# Altium PCB JacdacRotary 26.PcbDoc
Units mm, origin at the board's own origin, x right, y up, seen from the top; angles counter-clockwise.
Board outline 18.5 x 30.65 mm, 2 copper layers (Top Layer, Bottom Layer), stack 1.525 mm thick; 28 components, 20 nets, 93 pads, 20 vias.
Unrouted connection lines stored in the file: 14.
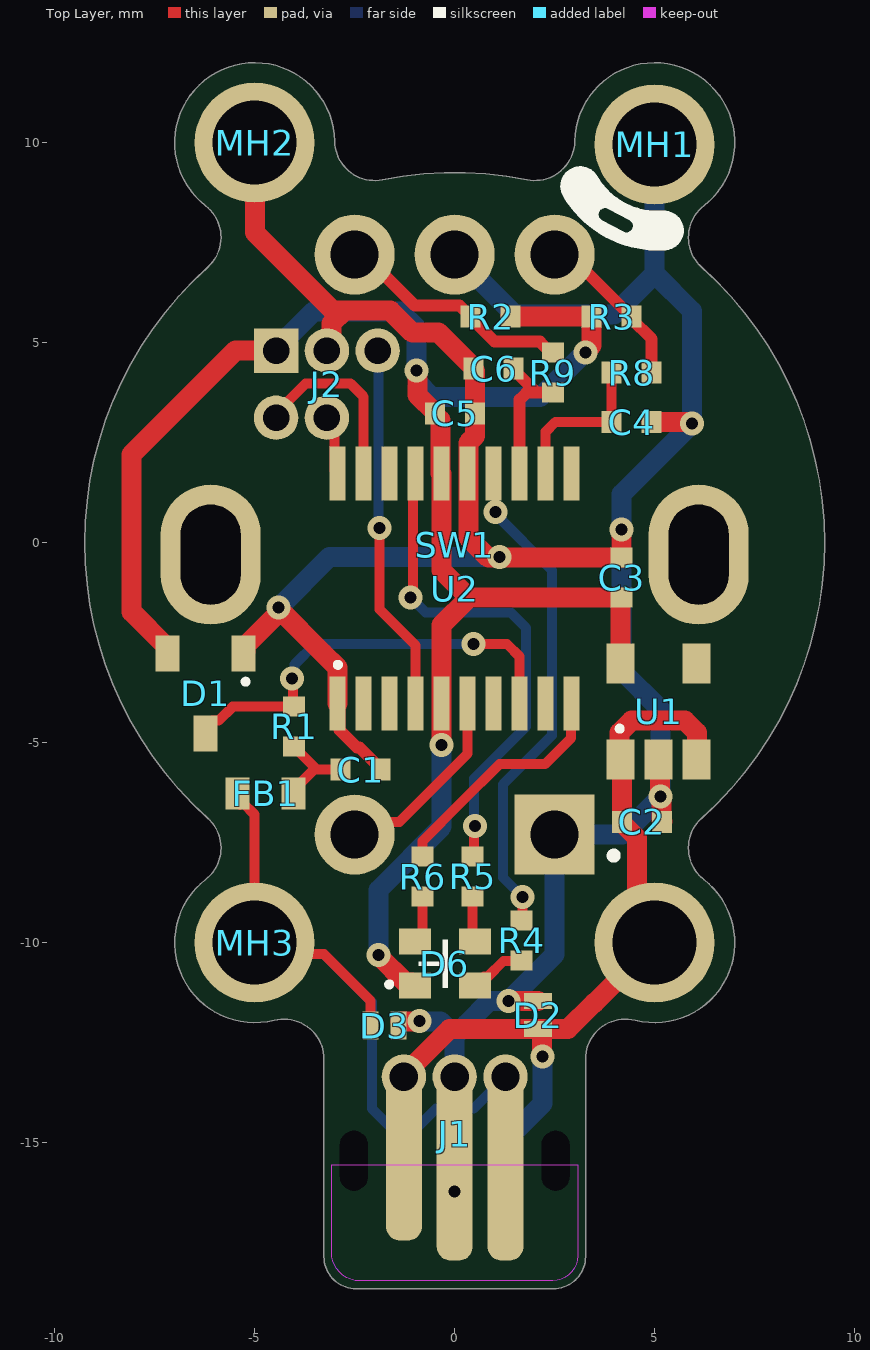
[diagram p0: Top Layer view]
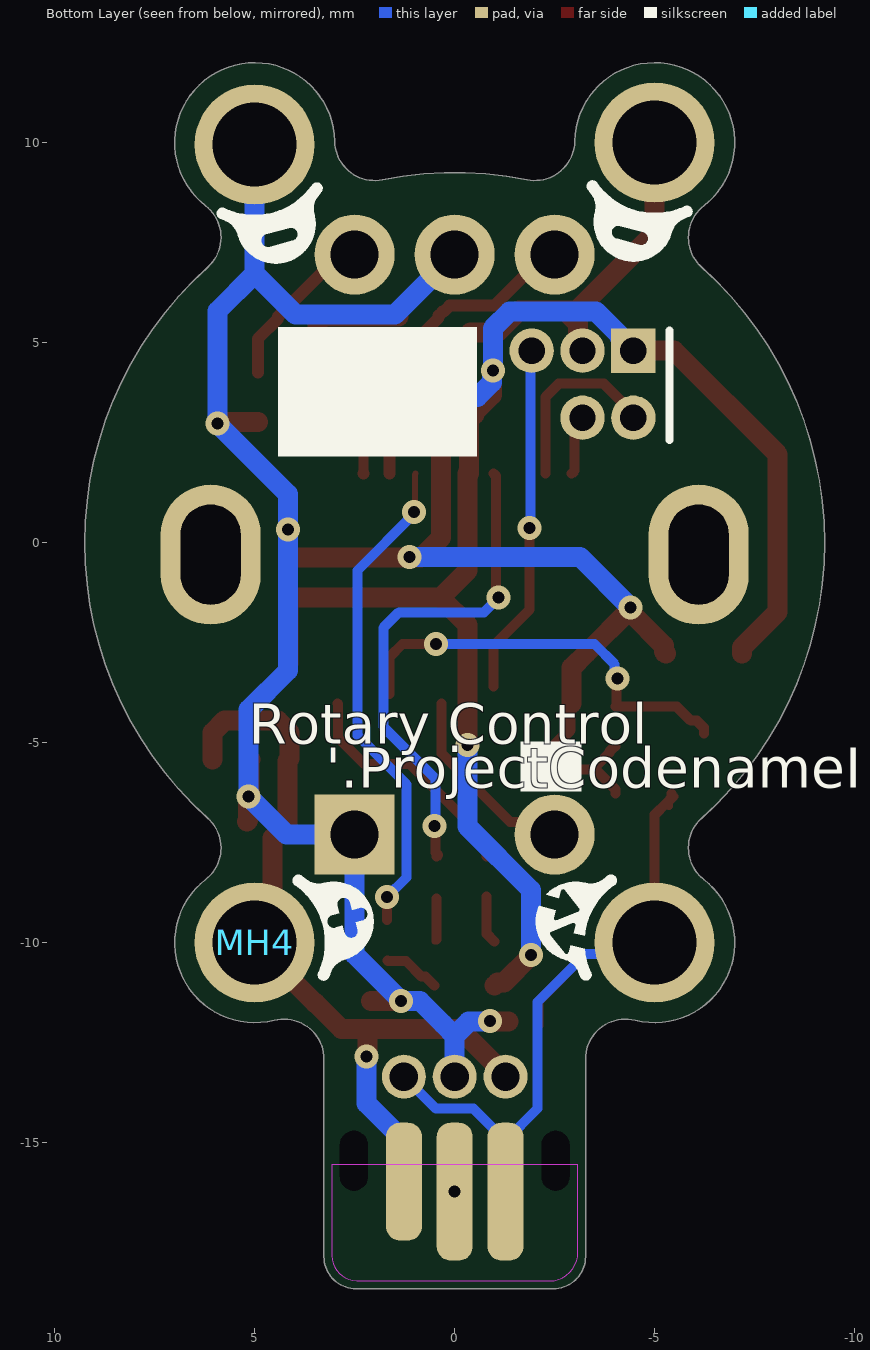
[diagram p1: Bottom Layer view, seen from below]

## Layer stack, top to bottom
Top Solder: solder mask 0.0102, Solder Resist, Dk 3.5
Top Layer: signal copper 0.0356
Dielectric 1: core 1.454, FR-4, Dk 4.2
Bottom Layer: signal copper 0.0356
Bottom Solder: solder mask 0.0102, Solder Resist, Dk 3.5

## Board outline
-3.27,-17.85 -3.27,-13.072 -3.27,-12.91 ccw(c-4.27,-12.91) -4.513,-11.94 cw(c-5,-10) -6.228,-8.422 ccw(c-6.842,-7.632) -6.174,-6.888 cw(c0,0) -6.175,6.888 ccw(c-6.842,7.632) -6.228,8.421 cw(c-5,10) -3,10.035 ccw(c-2,10.053) -1.805,9.072 cw(c0,0) 1.805,9.072 ccw(c2,10.053) 3,10.035 cw(c5,10) 6.228,8.421 ccw(c6.842,7.632) 6.175,6.888 cw(c0,0) 6.175,-6.888 ccw(c6.842,-7.632) 6.228,-8.421 cw(c5,-10) 4.513,-11.94 ccw(c4.27,-12.91) 3.27,-12.909 3.27,-13.071 3.27,-17.85 cw(c2.471,-17.851) 2.47,-18.65 -2.47,-18.65 cw(c-2.471,-17.851)

## Design rules (kind name [scope] priority, off if disabled: settings)
AssemblyTestPointUsage [All] p1: valid=2
BoardOutlineClearance BoardOutlineSwitchClearance [InComponent('SW1')] p1: gap=0.3 ignorepadtopadclearanceinfootprint=FALSE except(0: Arc-SplitContinuation Track-SplitContinuation SMDPad-SplitContinuation THPad-OutlineEdge THPad-SplitContinuation Via-SplitContinuation Fill-SplitContinuation Poly-SplitContinuation Region-SplitContinuation Text-SplitContinuation; 0.2: Text-OutlineEdge)
BoardOutlineClearance [All] p2: gap=0.3 ignorepadtopadclearanceinfootprint=FALSE except(0: Arc-SplitContinuation Track-SplitContinuation SMDPad-SplitContinuation THPad-SplitContinuation Via-SplitContinuation Fill-SplitContinuation Poly-SplitContinuation Region-OutlineEdge Region-SplitContinuation Text-SplitContinuation; 0.2: Text-OutlineEdge)
Clearance [All] p1: gap=0.125 ignorepadtopadclearanceinfootprint=FALSE except(0: Arc-Hole Track-Hole SMDPad-Hole THPad-Hole Via-Hole Fill-Hole Poly-Hole Region-Hole Text-Hole)
ComponentClearance MH5.0KeepoutaAreaClearance [InComponent('MH1') or InComponent('MH2')  or InComponent('MH3')  or InComponent('MH4') vs InComponent('SW1') or InComponent('J1') or InComponent('U3')] p1: gap=0 collisioncheckmode=3 verticalgap=0 showdistances=FALSE
ComponentClearance [All] p2: gap=0.2 collisioncheckmode=3 verticalgap=0.2 showdistances=FALSE
DiffPairsRouting [All] p1: maxlimit=2 minlimit=0.15 mostfreqgap=0.15 toplayer_minwidth=0.15 toplayer_maxwidth=2 toplayer_prefwidth=0.15 bottomlayer_minwidth=0.15 bottomlayer_maxwidth=2 bottomlayer_prefwidth=0.15 substack1={CB9D278B-8BF5-444A-AAF4-837A2A9DF42D} toplayer_{cb9d278b-8bf5-444a-aaf4-837a2a9df42d}_minwidth=0.381 toplayer_{cb9d278b-8bf5-444a-aaf4-837a2a9df42d}_maxwidth=0.381 toplayer_{cb9d278b-8bf5-444a-aaf4-837a2a9df42d}_prefwidth=0.381 bottomlayer_{cb9d278b-8bf5-444a-aaf4-837a2a9df42d}_minwidth=0.381 bottomlayer_{cb9d278b-8bf5-444a-aaf4-837a2a9df42d}_maxwidth=0.381 bottomlayer_{cb9d278b-8bf5-444a-aaf4-837a2a9df42d}_prefwidth=0.381 substack2={826B8647-A721-4255-895A-19F9591B9CD1} toplayer_{826b8647-a721-4255-895a-19f9591b9cd1}_minwidth=0.381 toplayer_{826b8647-a721-4255-895a-19f9591b9cd1}_maxwidth=0.381 toplayer_{826b8647-a721-4255-895a-19f9591b9cd1}_prefwidth=0.381 bottomlayer_{826b8647-a721-4255-895a-19f9591b9cd1}_minwidth=0.381 bottomlayer_{826b8647-a721-4255-895a-19f9591b9cd1}_maxwidth=0.381 bottomlayer_{826b8647-a721-4255-895a-19f9591b9cd1}_prefwidth=0.381 substack3={E64FCAF4-1BC8-437D-B1E0-0E5F2DC0F59E} toplayer_{e64fcaf4-1bc8-437d-b1e0-0e5f2dc0f59e}_minwidth=0.381 toplayer_{e64fcaf4-1bc8-437d-b1e0-0e5f2dc0f59e}_maxwidth=0.381 toplayer_{e64fcaf4-1bc8-437d-b1e0-0e5f2dc0f59e}_prefwidth=0.381 bottomlayer_{e64fcaf4-1bc8-437d-b1e0-0e5f2dc0f59e}_minwidth=0.381 bottomlayer_{e64fcaf4-1bc8-437d-b1e0-0e5f2dc0f59e}_maxwidth=0.381 bottomlayer_{e64fcaf4-1bc8-437d-b1e0-0e5f2dc0f59e}_prefwidth=0.381 substack4={E61CE66C-507C-4E1E-8E83-C905434AFC1C} toplayer_{e61ce66c-507c-4e1e-8e83-c905434afc1c}_minwidth=0.381 toplayer_{e61ce66c-507c-4e1e-8e83-c905434afc1c}_maxwidth=0.381 toplayer_{e61ce66c-507c-4e1e-8e83-c905434afc1c}_prefwidth=0.381 bottomlayer_{e61ce66c-507c-4e1e-8e83-c905434afc1c}_minwidth=0.381 bottomlayer_{e61ce66c-507c-4e1e-8e83-c905434afc1c}_maxwidth=0.381 bottomlayer_{e61ce66c-507c-4e1e-8e83-c905434afc1c}_prefwidth=0.381 maxuncoupledlength=25
FabricationTestPointUsage [All] p1: valid=2 allowmultiple=FALSE
HoleSize [All] p1: absolutevalues=TRUE maxlimit=2.54 minlimit=0.2 maxpercent=80.000 minpercent=20.000
MinimumSolderMaskSliver [All] p1: minsoldermaskwidth=0.005
PlaneClearance [All] p1: clearance=0.3
PlaneConnect [All] p1: planeconnectstyle=Relief reliefexpansion=0.5 reliefentries=4 reliefconductorwidth=0.2 reliefairgap=0.3
PolygonConnect "PolygonConnect GND" [isVIA] p1: connectstyle=Relief reliefconductorwidth=0.2 reliefentries=4 polygonreliefangle="90 Angle" airgapwidth=0.2
PolygonConnect [All] p2: connectstyle=Relief reliefconductorwidth=0.2 reliefentries=4 polygonreliefangle="90 Angle" airgapwidth=0.2
RoutingVias [All] p1: holewidth=0.3 width=0.6 viastyle="Through Hole" minholewidth=0.3 minwidth=0.6 maxholewidth=0.3 maxwidth=0.8
SilkToSilkClearance [All] p1: silktosilkclearance=0.001
SilkToSolderMaskClearance [IsPad] p1: minsilkscreentomaskgap=0.05 clearancetoexposedcopper=TRUE
SolderMaskExpansion [All] p1: expansion=0.075 istentingtop=FALSE
Width [All] p1: maxlimit=2 minlimit=0.15 preferedwidth=0.15 substack1={CB9D278B-8BF5-444A-AAF4-837A2A9DF42D} substack2={826B8647-A721-4255-895A-19F9591B9CD1} substack3={E64FCAF4-1BC8-437D-B1E0-0E5F2DC0F59E} substack4={E61CE66C-507C-4E1E-8E83-C905434AFC1C} minimp=50.000000 maximp=50.000000 favimp=50.000000
20 further rules are at their usual default settings.

## Components (designator, comment, footprint, x,y, rotation, side; value= is the part's Value field where it differs from the comment)
C1 "CL05C330JB5NNNC" "C0402_0.55MM - without outline" -2.35,-5.675 r180 top
C2 "CL05A105KP5NNNC" "C0402_0.55MM - without outline" 4.68,-6.981 r180 top
C3 "CL05A105KP5NNNC" "C0402_0.55MM - without outline" 4.17,-0.875 r270 top
C4 "Samsung'''" "C0402_0.55MM - without outline" 4.421,3.015 r180 top
C5 "CL05A105KP5NNNC" "C0402_0.55MM - without outline" 0.005,3.23 r180 top
C6 "Samsung'''" "C0402_0.55MM - without outline" 0.975,4.35 r0 top
D1 "BAT54S" "NXP-BAT54S-TO-236AB - without outline" -6.228,-3.777 r270 top
D2 "RCLAMP0521P-N" "TVS 0402 - L" 2.087,-11.809 r90 top
D3 "RCLAMP0521P-N" "TVS 0402 - L" -1.75,-12.075 r0 top
D6 "TZ-P4-1615RGBTCA1-0.55T" TZ-P4-1615RGBTCA1-0.55T -0.246,-10.525 r0 top
FB1 "TDK MPZ1608S102ATA00" "TDK MPZ1608 0.8mm - without outline" -4.725,-6.275 r0 top
J1 "3 pin jacdac edge connector" JACDAC_EDGE_CONNECTOR_NO_TRACES 0,-12.8 r180 top
J2 "Hack Connect Mini 1.27 mm pitch 2-row" HACK_CONNECT_MINI_5_X_1_27 -4.465,4.8 r270 top
MH1 "MH_5.0MMK_3.0MMC_2.1MMD_PTH" MH_5.0MMK_3.0MMC_2.1MMD_PTH 5,9.95 r0 top
MH2 "MH_5.0MMK_3.0MMC_2.1MMD_PTH" MH_5.0MMK_3.0MMC_2.1MMD_PTH -5,10 r90 top
MH3 "MH_5.0MMK_3.0MMC_2.1MMD_PTH" MH_5.0MMK_3.0MMC_2.1MMD_PTH -5,-10 r180 top
MH4 "MH_5.0MMK_3.0MMC_2.1MMD_PTH" MH_5.0MMK_3.0MMC_2.1MMD_PTH 5,-10 r180 bottom
R1 "RC0402FR-07220RL" "R0402 - Without outline" -4.014,-4.6 r270 top
R2 "10k" "R0402 - Without outline" 0.9,5.65 r180 top
R3 "10k" "R0402 - Without outline" 3.925,5.65 r0 top
R4 "RC0402FR-0730RL" "R0402 - WITHOUT OUTLINE" 1.675,-9.95 r90 top
R5 "RC0402FR-0730RL" "R0402 - WITHOUT OUTLINE" 0.45,-8.35 r90 top
R6 "RC0402FR-07150RL" "R0402 - Without outline" -0.8,-8.35 r90 top
R8 "10k" "R0402 - Without outline" 4.422,4.25 r0 top
R9 "10k" "R0402 - Without outline" 2.453,4.25 r90 top
SW1 "PEC12R-4225F-S0024" "PEC12R-4225F-S0024 -Standoff 2.4mm- Slotted MH" 0,-0.3 r180 top locked
U1 "LDO 3.3V/300 mA" "ON_SEMI-SOT23-5 - WITHOUT OUTLINE" 5.1,-4.225 r90 top
U2 "STM32F030F4P6" "20-TSSOP - WITHOUT OUTLINE" 0,-1.15 r90 top

## Footprints (in the part's own frame and the unit in brackets; to place one, negate y for a bottom-side part, rotate by r counter-clockwise, add the part's x,y. Pads: shape width x height; smd on the part's side, far side on the other; paste and mask are expansions set on the pad)
"20-TSSOP - WITHOUT OUTLINE" [mm]
  rect 1.35x0.4 smd: 1(-2.875,2.925) 2(-2.875,2.275) 3(-2.875,1.625) 4(-2.875,0.975) 5(-2.875,0.325) 6(-2.875,-0.325) 7(-2.875,-0.975) 8(-2.875,-1.625) 9(-2.875,-2.275) 10(-2.875,-2.925) 11(2.875,-2.925) 12(2.875,-2.275) 13(2.875,-1.625) 14(2.875,-0.975) 15(2.875,-0.325) 16(2.875,0.325) 17(2.875,0.975) 18(2.875,1.625) 19(2.875,2.275) 20(2.875,2.925)
  silkscreen extent -1.95,2.87 -1.86,2.97, body extent -3.3,-3.3 3.3,3.3, height 1.2
"C0402_0.55MM - without outline" [mm]
  rect 0.5x0.55 smd: 1(-0.5,0) 2(0.5,0)
  body extent -0.5,-0.25 0.5,0.25, height 0.55
HACK_CONNECT_MINI_5_X_1_27 [mm]
  rect 1.11x1.11 hole 0.66: 1(0,0)
  round 1.11 hole 0.66: 2(1.676,0) 3(0,1.27) 4(1.676,1.27) 5(0,2.54)
JACDAC_EDGE_CONNECTOR_NO_TRACES [mm] "JacDac 3 pin connector with no traces"
  rrect78% 0.9x2.95 smd far side paste-1 mask+0: 1(-1.27,3.175)
  rrect78% 0.9x4.3 smd paste-1 mask+0: 1(1.27,2.5)
  round 1.11 / inner round 0.71 / far side round 1.1 hole 0.71 paste-0.254 mask+0: 1(1.27,0.55) 2(0,0.55) 3(-1.27,0.55)
  rrect78% 0.9x3.45 smd far side paste-1 mask+0: 2(0,3.425) 3(1.27,3.425)
  rrect78% 0.9x4.8 smd paste-1 mask+0: 2(0,2.75) 3(-1.27,2.75)
  round 0 hole 0.7 slot 1.5 at 90 deg unplated: ""(-2.52,2.65) ""(2.52,2.65)
  Top Layer keep-out region: -3.075,2.75 -3.07,5.033 -2.987,5.341 -2.761,5.567 -2.453,5.65 -2.453,5.65 2.27,5.65 2.545,5.635 2.794,5.516 2.978,5.31 3.07,5.05 3.07,5.05 3.07,2.75
  Bottom Layer lines w0.2: -1.126,0.85 -1.27,0.85
  Bottom Layer keep-out region: -3.07,2.75 -3.07,5.033 -3.023,5.269 -2.889,5.469 -2.689,5.603 -2.453,5.65 -2.453,5.65 2.27,5.65 2.545,5.635 2.794,5.516 2.978,5.31 3.07,5.05 3.07,5.05 3.07,2.75
MH_5.0MMK_3.0MMC_2.1MMD_PTH [mm] "Mounting Hole 5.0mm clearance, 3.1 annualar ring and 2.1mm PTH"
  round 3 hole 2.1 mask+0.05: 1(0,0)
"NXP-BAT54S-TO-236AB - without outline" [mm] "SOT23, 3-Leads, Body 2.90x2.30mm, Pitch 0.95mm, IPC Medium Density"
  rect 0.9x0.6 smd: 1(-1,0.95) 2(-1,-0.95) 3(1,0)
  silkscreen extent -0.35,0.95 -0.25,1.05, body extent -1.32,-1.5 1.32,1.5, height 1.12
"ON_SEMI-SOT23-5 - WITHOUT OUTLINE" [mm]
  rect 1x0.7 smd: 1(-1.2,0.95) 2(-1.2,0) 3(-1.2,-0.95) 4(1.2,-0.95) 5(1.2,0.95)
  silkscreen extent -0.47,0.92 -0.38,1.02, body extent -1.5,-1.57 1.5,1.58, height 1.1
"PEC12R-4225F-S0024 -Standoff 2.4mm- Slotted MH" [mm] "Rotary Encoder Mechanical 24 Quadrature (Incremental) Vertical"
  rect 2x2 hole 1.2: 1(-2.5,7)
  round 2 hole 1.2: 2(2.5,7) A(-2.5,-7.5) B(2.5,-7.5) C(0,-7.5)
  oval 2.5x3.5 hole 2.5 slot 1.5 at 0 deg unplated: M1(-6.1,0) M2(6.1,0)
  silkscreen extent -4.05,7.45 -3.9,7.6, body extent -6.55,-7.7 6.55,7.2, height 21.9
"R0402 - Without outline" [mm]
  rect 0.5x0.55 smd: 1(-0.5,0) 2(0.5,0)
  body extent -0.5,-0.25 0.5,0.25, height 0.35
"R0402 - WITHOUT OUTLINE" [mm]
  rect 0.5x0.55 smd: 1(-0.5,0) 2(0.5,0)
  body extent -0.5,-0.25 0.5,0.25, height 0.35
"TDK MPZ1608 0.8mm - without outline" [mm]
  rect 0.6x0.8 smd paste-0.1: 1(-0.7,0) 2(0.7,0)
  body extent -0.8,-0.4 0.8,0.4, height 0.8
"TVS 0402 - L" [mm] "TVS 0402 RoHS"
  rect 0.4x0.7 smd paste-0.038 mask+0.05: 1(-0.35,0) 2(0.35,0)
  body extent -0.5,-0.3 0.5,0.3, height 0.5
TZ-P4-1615RGBTCA1-0.55T [mm] "1615 Light Emitting Diodes (LED) RoHS"
  rect 0.8x0.65 smd mask+0.05: 1(-0.75,-0.55) 2(-0.75,0.55) 3(0.75,0.55) 4(0.75,-0.55)
  silkscreen extent -1.44,-0.6 0.07,0.6, body extent -0.8,-0.75 0.8,0.75, height 0.55

## Part data
C1: "CAP CER 33PF 50V C0G/NP0 0402", Capacitance=33pF, Case Code (Imperial)=0402, Case Code (Metric)=1005, Dielectric=C0G, Manufacturer=Samsung, Max Operating Temperature=125°C, Min Operating Temperature=-55°C, Package Quantity=1, Supplier Part Number 1=1276-1272-1-ND, Temperature Coefficient=300ppm/°C, Tolerance=5%, Voltage=50V, Case/Package=0402, Category="Ceramic Capacitors", ComponentLink1Description="Online datasheet", ComponentLink1URL=https://datasheet.ciiva.com/15195/getdatasheetpartid-355282-15195687.pdf, Construction=Flat, Contact Plating=Tin, Depth=0.5mm, Height=0.5mm, Lead Free="Lead Free", Length=1mm, Manufacturer Part Number=CL05C330JB5NNNC, Material=Ceramic, Mount="Surface Mount", Packaging="Tape and Reel", Pricing 1="1=0.10000, 10=0.02300, 50=0.01260, 100=0.01040, 500=0.00740, 1000=0.00582, 2500=0.00529, 5000=0.00487 (USD)", Pricing 2="1=0.12500, 25=0.02900, 100=0.01300, 250=0.01100, 500=0.00900, 1000=0.00600 (USD)", Pricing 3="1=0.10000, 10=0.01400, 50=0.01400, 100=0.01100, 1000=0.00600, 10000=0.00400 (USD)", Pricing 4="150=0.01120, 500=0.00860, 2500=0.00640, 5000=0.00550 (GBP)", Radiation Hardening=No, RoHS=Yes, RoHS Compliant=Yes, Series=CL, Stock 1=5436088, Stock 2=45340, Stock 3=8877, Stock 4=10934, Supplier 1=Digi-Key, Supplier 2=Newark, Supplier 3=Mouser, Supplier 4=Farnell, Supplier Part Number 2=82AC9259, Supplier Part Number 3=187-CL05C330JB5NNNC, Supplier Part Number 4=3013373RL, Thickness=0.022inch, Voltage Rating=50V, Voltage Rating (DC)=50V, Width=0.02inch
C2 C3 C5: "CAP CER 1UF 10V X5R 0402", Capacitance=1µF, Case Code (Imperial)=0402, Case Code (Metric)=1005, Dielectric=X5R, Manufacturer=Samsung, Max Operating Temperature=85°C, Min Operating Temperature=-55°C, Package Quantity=1, Supplier Part Number 1=1276-1076-1-ND, Tolerance=10%, Voltage Rating=10V, Case/Package=0402, Category=Capacitors, Checked=?, ComponentLink1Description="Online datasheet", ComponentLink1URL=https://datasheet.ciiva.com/15195/getdatasheetpartid-358390-15195630.pdf, Contact Plating=Tin, Created=DG, Depth=0.5mm, Height=0.5mm, Length=1mm, Manufacturer Part Number=CL05A105KP5NNNC, Material=Ceramic, Mount="Surface Mount", Packaging="Tape and Reel", Pricing 1="1=0.10000, 10=0.03900, 50=0.02100, 100=0.01720, 500=0.01228, 1000=0.00965, 2500=0.00877, 5000=0.00807 (USD)", Pricing 2="1=0.10000, 10=0.04200, 100=0.01800, 500=0.01300, 1000=0.01000, 2500=0.00900 (USD)", Pricing 3="10=0.02450, 100=0.02000, 500=0.01310, 2500=0.00920, 5000=0.00810, 10000=0.00640, 50000=0.00490 (GBP)", Radiation Hardening=No, RoHS=Yes, Stock 1=5705569, Stock 2=928941, Stock 3=53670, Supplier 1=Digi-Key, Supplier 2=Mouser, Supplier 3=Farnell, Supplier Part Number 2=187-CL05A105KP5NNNC, Supplier Part Number 3=3013329, Thickness=0.022inch, Width=0.02inch
C4 C6: library part CL05B103JO5NNNC, "CAP CER 10000PF 16V X7R 0402", Capacitance=10nF, Case Code (Imperial)=0402, Case Code (Metric)=1005, Dielectric=X7R, Manufacturer=Samsung, Max Operating Temperature=125°C, Min Operating Temperature=-55°C, Package Quantity=10000, Supplier Part Number 1=1276-1496-1-ND, Tolerance=5%, Voltage Rating=16V, Case/Package=0402, Category="Ceramic Capacitors", Checked By=?, ComponentLink1Description="Online datasheet", ComponentLink1URL=https://datasheet.ciiva.com/25738/cl05b103jo5nnnc-25738915.pdf?src-supplier=Digi-Key, Construction=Flat, Created By="D. Gakure", Depth=0.5mm, Height=0.5mm, Length=1mm, Manufacturer Part Number=CL05B103JO5NNNC, Mount="Surface Mount", Packaging="Tape and Reel", Pricing 1="1=0.10000, 10=0.02800, 50=0.01520, 100=0.01250, 500=0.00890, 1000=0.00699, 2500=0.00635, 5000=0.00584 (USD)", Pricing 2="1=0.10000, 10=0.01600, 50=0.01600, 100=0.01300, 1000=0.00700, 10000=0.00500 (USD)", Radiation Hardening=No, RoHS=Yes, RoHS Compliant=Yes, Series=CL, Stock 1=24167, Stock 2=86985, Supplier 1=Digi-Key, Supplier 2=Mouser, Supplier Part Number 2=187-CL05B103JO5NNNC, Thickness=0.022inch, Voltage Rating (DC)=16V, Width=0.02inch
D1: "DIODE ARRAY SCHOTTKY 30V SOT23", Manufacturer=Nexperia, Manufacturer Part Number=BAT54S,235, Supplier Part Number 1=1727-1868-1-ND, Category="Rectifier Diodes", ComponentLink1Description="NXP datasheet online", ComponentLink1URL=https://assets.nexperia.com/documents/data-sheet/BAT54_SER.pdf, Pricing 1="1=0.13000, 10=0.11900, 100=0.05610, 500=0.03326, 1000=0.02185, 5000=0.02138 (USD)", RoHS=No, Stock 1=14011, Supplier 1=Digi-Key, Supplier 2=Mouser, Supplier 3=RSComponents, Supplier Part Number 2=771-BAT54S235, Supplier Part Number 3=1707990
D2 D3: "Bidirectional 5V (Max) 6V 16V 3.5A (8/20us) 0402 TVS RoHS", Manufacturer="Born Semiconductor", Package=0402, Supplier1 Part Number=C316043, Checked By=?, ComponentLink1Description="Online datasheet", ComponentLink1URL=https://datasheet.lcsc.com/szlcsc/Bourne-Semicon-Shenzhen-RCLAMP0521P-N_C316043.pdf, Created By="D Gakure", Manufacturer Part Number=RCLAMP0521P-N, Supplier1=LCSC
D6: "1615 Light Emitting Diodes (LED) RoHS", Manufacturer=TUOZHAN, Package=1615, Supplier 1 Part Number=C779813, Category=Optoelectronics, Checked By=?, ComponentLink1Description="Online datasheet", ComponentLink1URL=https://datasheet.lcsc.com/szlcsc/2009041238_TUOZHAN-TZ-P4-1615RGBTCA1-0-55T_C779813.pdf, Created By="D. Gakure", Manufacturer Part Number=TZ-P4-1615RGBTCA1-0.55T, Packaging="Tape & Reel (TR)", RoHS="RoHS Compliant", Size / Dimension=1.6x1.5mm, Supplier 1=LCSC
FB1: "0603 1k@100MHz 0.8A chip", Case Code (Imperial)=0603, Case Code (Metric)=1608, Current Rating=800mA, DC Resistance (DCR)=300mR, Manufacturer=TDK, Manufacturer Part Number=MPZ1608S102ATA00, Package Quantity=4000, Supplier Part Number 1=445-8694-1-ND, Tolerance=25%, Case/Package=0603, ComponentLink2Description="datasheet online", ComponentLink2URL=https://www.mouser.co.uk/datasheet/2/400/eads_commercial_power_mpz1608_en-923650.pdf, ComponentLink3Description=datasheet, ComponentLink3URL="Y:\System\Altium\Libraries 2014\TDK\Datasheets\eads_commercial_power_mpz1608_en-923650.pdf", Core Material=Ferrite, Height=0.037inch, Impedance="1kR @ 100MHz", Length=0.063inch, Max DC Current=800mA, Mount="Surface Mount", Packaging="Tape and Reel", Pricing 1="1=0.1, 10=0.079, 25=0.0716, 50=0.0644, 100=0.0472, 250=0.03432, 500=0.03146, 1000=0.02717 (USD)", Stock 1=113542, Supplier 1=Digi-Key, Supplier 2=Mouser, Supplier Part Number 2=810-MPZ1608S102ATA00, Width=0.031inch
J1: library part "Jacdac edge connector", "3 pin Jacdac edge connector 1.27mm pitch", Manufacturer Part Number=JACDAC_EDGE_CONNECTOR, Checked By=?, ComponentLink1Description="Yuliang JACDAC cable connector drawing online", ComponentLink1URL=https://github.com/microsoft/jacdac-mdk/blob/main/connector/JACDAC-Connector-by-Yuliang-2020-11-28.pdf, ComponentLink2Description="JACDAC PCB edge connector spec onlin", ComponentLink2URL=https://github.com/microsoft/jacdac-mdk/blob/main/connector/JACDAC_PCB_Edge_Connector_Drawing_JD-PEC-01_rev_01.pdf, Created By="D. Gakure", PCB Type="1.6mm FR4"
J2: library part HACK_CONNECT_MINI
MH1 MH2 MH3 MH4: "Mounting Hole 5.0mm keepout, 3.0mm annualar ring and 2.1mm Drill PTH"
R1: "RES SMD 220 OHM 1% 1/16W 0402", Case Code (Imperial)=0402, Case Code (Metric)=1005, Manufacturer=Yageo, Max Operating Temperature=155°C, Max Power Dissipation=63mW, Min Operating Temperature=-55°C, Package Quantity=1, Power Rating=62.5mW, Resistance=220R, Resistor Type="Thick Film", Supplier Part Number 1=311-220LRCT-ND, Temperature Coefficient=100ppm/°C, Tolerance=1%, Voltage Rating=50V, Case/Package=0402, Category=Resistors, Checked=?, ComponentLink1Description="Online datasheet", ComponentLink1URL=https://datasheet.ciiva.com/11819/0900766b80c66297-11819466.pdf, Created=D.G, Depth=0.5mm, Features="Moisture Resistant", Height=0.016inch, Lead Free="Lead Free", Length=1mm, Manufacturer Part Number=RC0402FR-07220RL, Military Standard=Not, Number of Pins=2, Number of Terminations=2, Packaging="Tape and Reel", Pricing 1="1=0.10000, 10=0.01400, 100=0.00580, 1000=0.00262, 2500=0.00228, 5000=0.00188 (USD)", Pricing 2="1=0.10000, 10=0.01200, 100=0.00400, 1000=0.00400, 2500=0.00400, 10000=0.00300 (USD)", Pricing 3="1=0.08130, 25=0.01210, 100=0.01120, 250=0.01030, 500=0.00900 (GBP)", REACH SVHC="No SVHC", RoHS=Yes, Stock 1=1286042, Stock 2=324625, Stock 3=18234, Supplier 1=Digi-Key, Supplier 2=Mouser, Supplier 3=Farnell, Supplier Part Number 2=603-RC0402FR-07220RL, Supplier Part Number 3=2147864, Termination=SMD/SMT, Voltage Rating (DC)=50V, Width=0.02inch
R2 R3 R8 R9: library part RC0402FR-0710KL, "RES SMD 10K OHM 1% 1/16W 0402", Case Code (Imperial)=0402, Case Code (Metric)=1005, Manufacturer=Yageo, Max Operating Temperature=155°C, Min Operating Temperature=-55°C, Power Rating=62.5mW, Resistance=10kR, Resistor Type="Thick Film", Supplier Part Number 1=311-10.0KLRCT-ND, Temperature Coefficient=100ppm/°C, Tolerance=1%, Voltage Rating=50V, Case/Package=0402, Category=Resistors, Checked=?, ComponentLink1Description=https://datasheet.ciiva.com/7660/38568-7660787.pdf?src-supplier=Element14, ComponentLink1URL=https://datasheet.ciiva.com/7660/38568-7660787.pdf?src-supplier=Element14, ComponentLink2Description=https://datasheet.ciiva.com/7849/1784430-7849813.pdf?src-supplier=Element14, ComponentLink2URL=https://datasheet.ciiva.com/7849/1784430-7849813.pdf?src-supplier=Element14, ComponentLink3Description=https://datasheet.ciiva.com/7849/1686128-7849814.pdf?src-supplier=Element14, ComponentLink3URL=https://datasheet.ciiva.com/7849/1686128-7849814.pdf?src-supplier=Element14, ComponentLink4Description=https://datasheet.ciiva.com/7849/1784430-7849815.pdf?src-supplier=Element14, ComponentLink4URL=https://datasheet.ciiva.com/7849/1784430-7849815.pdf?src-supplier=Element14, ComponentLink5Description=https://datasheet.ciiva.com/22747/1018594-22747512.pdf?src-supplier=Element14, ComponentLink5URL=https://datasheet.ciiva.com/22747/1018594-22747512.pdf?src-supplier=Element14, ComponentLink6Description=https://datasheet.ciiva.com/12667/pyu-rc0402-51-rohs-l-6-r-12667067.pdf?src-supplier=Mouser, ComponentLink6URL=https://datasheet.ciiva.com/12667/pyu-rc0402-51-rohs-l-6-r-12667067.pdf?src-supplier=Mouser, ComponentLink7Description=https://datasheet.ciiva.com/7983/1018594-7983486.pdf?src-supplier=Element14, ComponentLink7URL=https://datasheet.ciiva.com/7983/1018594-7983486.pdf?src-supplier=Element14, Created=DG, Depth=0.5mm, Height=0.32mm, Lead Free="Lead Free", Lead Pitch=0.2mm, Length=1mm, Manufacturer Part Number=RC0402FR-0710KL, Military Standard=Not, Number of Pins=2, Number of Terminations=2, Packaging="Tape and Reel", Pricing 1="1=0.10000, 10=0.01400, 100=0.00580, 1000=0.00262, 2500=0.00228, 5000=0.00188 (USD)", Pricing 2="1=0.10000, 10=0.01300, 100=0.00400, 1000=0.00300, 2500=0.00300, 10000=0.00200 (USD)", Pricing 3="10000=0.00350 (GBP)", REACH SVHC="No SVHC", RoHS=Yes, Stock 1=40173593, Stock 2=23672167, Stock 3=370000, Supplier 1=Digi-Key, Supplier 2=Mouser, Supplier 3=Farnell, Supplier Part Number 2=603-RC0402FR-0710KL, Supplier Part Number 3=2363463, Termination=SMD/SMT, Voltage Rating (DC)=50V, Width=0.5mm, Working Voltage=50V
R4 R5: "RES SMD 30 OHM 1% 1/16W 0402", Case Code (Imperial)=0402, Case Code (Metric)=1005, Manufacturer=Yageo, Max Operating Temperature=155°C, Max Power Dissipation=63mW, Min Operating Temperature=-55°C, Resistance=30R, Resistance Tolerance=1%, Resistor Type="Thick Film", Supplier Part Number 1=311-30LRCT-ND, Temperature Coefficient=100ppm/°C, Voltage Rating=50V, Case/Package=0402, Category="Chip SMD Resistors", Checked By=?, ComponentLink1Description="Online datasheet", ComponentLink1URL=https://datasheet.ciiva.com/7849/1018594-7849958.pdf, Construction=Rectangular, Contact Plating=Tin,Matte, Created By="D. Gakure", Depth=0.5mm, Features="Moisture Resistant", Height=0.35mm, Lead Free="Lead Free", Length=1mm, Manufacturer Part Number=RC0402FR-0730RL, Military Standard=Not, Number of Terminations=2, Packaging="Tape and Reel", Power Rating=63mW, Pricing 1="1=0.10000, 10=0.01400, 100=0.00580, 1000=0.00260, 2500=0.00226, 5000=0.00186 (USD)", Pricing 2="1=0.10000, 10=0.01200, 50=0.01200, 100=0.00400, 1000=0.00400, 10000=0.00300 (USD)", Pricing 3="10=0.01210, 100=0.00420, 500=0.00370, 2500=0.00280, 5000=0.00250, 10000=0.00230, 50000=0.00150 (GBP)", REACH SVHC=Unknown, RoHS=Yes, RoHS Compliant=Yes, Series=RC, Size Code=0402, Stock 1=2973, Stock 2=41804, Stock 3=4422, Supplier 1=Digi-Key, Supplier 2=Mouser, Supplier 3=Farnell, Supplier Part Number 2=603-RC0402FR-0730RL, Supplier Part Number 3=1458775, Termination=SMD/SMT, Tolerance=1%, Voltage Rating (DC)=50V, Width=0.5mm
R6: "RES SMD 150 OHM 1% 1/16W 0402", Case Code (Imperial)=0402, Case Code (Metric)=1005, Manufacturer=Yageo, Max Operating Temperature=155°C, Max Power Dissipation=63mW, Min Operating Temperature=-55°C, Package Quantity=1, Power Rating=62.5mW, Resistance=150R, Resistance Tolerance=1%, Resistor Type="Thick Film", Supplier Part Number 1=311-150LRCT-ND, Temperature Coefficient=100ppm/°C, Voltage Rating=50V, Case/Package=0402, Category="Chip SMD Resistors", Checked By=?, ComponentLink1Description="ine datasheet", ComponentLink1URL=https://datasheet.ciiva.com/11808/0900766b80c66297-11808422.pdf, Construction=Rectangular, Created By="D. Gakure", Depth=0.5mm, Features="Moisture Resistant", Height=0.016inch, Lead Free="Lead Free", Length=1mm, Manufacturer Part Number=RC0402FR-07150RL, Military Standard=Not, Number of Terminations=2, Packaging="Tape and Reel", Pricing 1="1=0.10000, 10=0.01400, 100=0.00580, 1000=0.00260, 2500=0.00226, 5000=0.00186 (USD)", Pricing 2="1=0.10000, 10=0.01200, 50=0.01200, 100=0.00400, 1000=0.00400, 10000=0.00300 (USD)", Pricing 3="10000=0.00270, 50000=0.00200 (GBP)", REACH SVHC="No SVHC", RoHS=Yes, RoHS Compliant=Yes, Series=RC, Stock 1=5214533, Stock 2=582717, Stock 3=880000, Supplier 1=Digi-Key, Supplier 2=Mouser, Supplier 3=Farnell, Supplier Part Number 2=603-RC0402FR-07150RL, Supplier Part Number 3=2421893, Technology="THICK FILM", Termination=SMD/SMT, Tolerance=1%, Width=0.02inch, Working Voltage=50V
SW1: "Rotary Encoder Mechanical 24 Quadrature (Incremental) Vertical", Manufacturer=Bourns, Max Operating Temperature=70°C, Min Operating Temperature=-30°C, Package Quantity=75, Supplier Part Number 1=PEC12R-4225F-S0024-ND, Built in Switch=Yes, Category="Switch Accessories", Checked By=?, ComponentLink1Description="Online datasheet", ComponentLink1URL=https://datasheet.ciiva.com/30488/0900766b81273a18-30488727.pdf, Created By="D. Gakure", Detent=Yes, Encoder Type=Mechanical, Height=13.4mm, Hole Diameter=1mm, Length=13.4mm, Manufacturer Part Number=PEC12R-4225F-S0024, Mount="Through Hole,PCB", Number of Channels=2, Orientation=Vertical, Output Type=Quadrature,Incremental, Packaging=Bulk, Pricing 1="1=1.16000, 5=1.11800, 10=1.07500, 25=1.01040, 50=0.92440, 100=0.79550, 250=0.75248, 500=0.70950, 1000=0.68800 (USD)", Pricing 2="1=1.37000, 5=1.13000, 10=0.96000, 20=0.89300, 40=0.80000, 75=0.69800, 375=0.59100 (GBP)", Pricing 3="1=1.12000, 10=0.98400, 50=0.89900, 100=0.77800, 1000=0.68800, 10000=0.64700 (USD)", Pricing 4="1=1.26900, 10=1.04400, 25=0.91200, 100=0.76700, 250=0.74000 (USD)", Pricing 5="10=1.04400, 25=0.91200, 100=0.76700, 250=0.74000 (USD)", Pulses per Revolution=24, REACH SVHC="No SVHC", RoHS=Yes, RoHS Compliant=Yes, Series=PEC12R, Stock 1=6612, Stock 2=1084, Stock 3=1691, Stock 4=174, Stock 5=1254, Supplier 1=Digi-Key, Supplier 2=Farnell, Supplier 3=Mouser, Supplier 4=RSComponents, Supplier 5=RSComponents, Supplier Part Number 2=2663533, Supplier Part Number 3=652-PEC12R-4225F-S24, Supplier Part Number 4=7816811, Supplier Part Number 5=7816811P, Termination="PC Pin", Width=12.5mm
U1: library part NCP114BSN330T1G, "CMOS Low Dropout Regulator (LDO), 300 mA 3.3V, Non-Active Discharge, TSOP5", Case/Package=TSOP, Manufacturer="ON Semiconductor", Max Input Voltage=5.5V, Max Operating Temperature=85°C, Max Output Current=300mA, Min Input Voltage=1.7V, Min Operating Temperature=-40°C, Output Voltage=3.3V, Quiescent Current=50uA, Supplier Part Number 1=NCP114BSN330T1GOSCT-ND, Accuracy=2%, Category="Voltage Regulators - Linear", ComponentLink1Description="Datasheet (online)", ComponentLink1URL=http://www.farnell.com/datasheets/2118270.pdf?src-supplier=Farnell, Lead Free="Lead Free", Manufacturer Part Number=NCP114BSN330T1G, Mount="Surface Mount", Number of Outputs=1, Number of Pins=5, Output Type=Fixed, Polarity=Positive, Pricing 1="1=0.45000, 10=0.33700, 25=0.29440, 100=0.19060, 250=0.15780, 500=0.12624, 1000=0.09679 (USD)", RoHS=Yes, RoHS Compliant=Yes, Stock 1=4067, Supplier 1=Digi-Key, Supplier 2=Mouser, Supplier 3=RSComponents, Supplier Part Number 2=863-NCP114BSN330T1G, Supplier Part Number 3=1263179
U2: library part "ST STM32F030F4P6", "ARM Cortex-M0 STM32F0 Microcontroller IC 32-Bit 48MHz 16KB (16K x 8) FLASH", Case/Package=TSSOP, Frequency=48MHz, Manufacturer=STMicroelectronics, Max Operating Temperature=85°C, Max Power Dissipation=182mW, Max Supply Voltage=3.6V, Min Operating Temperature=-40°C, Min Supply Voltage=2.4V, Package Quantity=74, Supplier Part Number 1=2393635, Categories="Integrated Circuits", Category=Microcontrollers, Checked=?, Checked By=?, ComponentLink1Description="Online datasheet", ComponentLink1URL=https://datasheet.ciiva.com/29720/dm00088500-29720640.pdf, Contact Plating=Gold, Core Architecture=ARM, Created=DG, Created By="D. Gakure", Data Bus Width=32b, Height=1.05mm, Interface=I2C,SPI,UART,USART, Lead Free="Lead Free", Length=6.6mm, Manufacturer Part Number=STM32F030F4P6, Max Frequency=48MHz, Memory Size=16KB, Memory Type=FLASH, Number of ADC Channels=16, Number of I2C Channels=1, Number of I/Os=15, Number of Pins=20, Number of Programmable I/O=15, Number of PWM Channels=6, Number of SPI Channels=1, Number of Timers/Counters=5, Oscillator Type=Internal, Packaging=Rail/Tube, Peripherals=POR,PWM,WDT,DMA, Pricing 1="1=0.97500, 25=0.85400, 50=0.75500, 100=0.65600, 250=0.61800, 500=0.58000, 1000=0.52500, 2500=0.46900 (GBP)", Pricing 3="100=0.43900, 250=0.38800, 1000=0.37300 (GBP)", Radiation Hardening=No, RAM Size=4KB, REACH SVHC="No SVHC", RoHS=Yes, Stock 1=1196, Stock 3=48, Supplier 1=Farnell, Supplier 2=Digi-Key, Supplier 3=RSComponents, Supplier Part Number 2=497-14044-5-ND, Supplier Part Number 3=7925925P, Watchdog Timer=Yes, Width=4.5mm

## Via types
v1: diameter 0.6, hole 0.3, Top Layer to Bottom Layer, tented both sides, 20 vias

## Nets (pads, with @x,y where several pads share a name; then routed paths per layer and width w, separated by ;. In a path a pad name is that pad's centre, name@x,y a point inside that pad or via, vN(x,y) a via of type N, cw(c..) or ccw(c..) an arc to the next point about the centre after c; other vN are vias at no path point)
3V3: C3.2 C5.2 D1.2 D6.1 J2.1 R2.1 R3.1 U1.5 U2.5 U2.16 | length 46.1
  Top Layer w0.5: D1.2 -7.178,-2.627 -8.075,-1.73 -8.075,2.209 -5.484,4.8 J2.1 ; v1(-1.905,-10.308) -1.905,-10.321 -1.226,-11 -1.071,-11 D6.1 ; v1(-0.952,4.307) -0.933,4.288 -0.933,3.693 -0.495,3.255 C5.2 ; C5.2@-0.495,3.205 -0.355,3.065 U2.16@-0.355,1.725 ; v1(-0.325,-5.057) -0.325,-2.056 0.356,-1.375 ; U2.16 -0.325,-0.694 0.356,-1.375 ; R2.1 R3.1 3.425,4.932 3.27,4.777 v1(3.27,4.75) ; U1.5 C3.2@4.15,-1.375 ; C3.2 C3.2@4.15,-1.375 ; 0.356,-1.375 C3.2@4.15,-1.375
  Bottom Layer w0.3: J2.1 J2.1@-4.125,5.14
  Bottom Layer w0.5: J2.1@-4.125,5.14 -4.125,5.185 -3.536,5.775 -1.37,5.775 -0.952,5.357 v1(-0.952,4.307) -0.933,4.288 -0.933,4.01 -0.565,3.642 2.135,3.642 3.243,4.75 v1(3.27,4.75) ; v1(-1.905,-10.308) -1.905,-8.682 -0.325,-7.102 v1(-0.325,-5.057)
GND: C1.1 C2.1 C3.1 C4.1 C5.1 C6.1 D1.1 D2.2 D3.2 J1.2 J2.3 MH1.1 MH2.1 SW1.1 SW1.C U1.2 U2.1 U2.15 | length 71.3
  Top Layer w0.3: U2.1 -2.875,-4.075 -2.875,-4.689 -2.438,-5.126 -2.374,-5.126 -1.85,-5.65 C1.1
  Top Layer w0.35: J1.2@0,-13.334 0,-13.35 J1.2@0.065,-13.285
  Top Layer w0.5: D1.1 -5.228,-2.727 -5.228,-2.577 -4.419,-1.768 -4.419,-1.644 v1(-4.4,-1.625) -4.4,-1.652 -3.296,-2.756 -2.925,-3.127 U2.1 ; MH2.1 -4.995,9.995 -4.995,7.75 -3.044,5.799 -2.763,5.799 ; J2.3 -3.078,4.917 -3.078,5.484 -2.763,5.799 ; D3.2@-1.35,-11.975 -0.897,-11.975 v1(-0.878,-11.956) ; C6.1@0.475,4.325 0.505,4.295 C5.1 0.505,2.661 0.34,2.496 0.34,0.124 0.839,-0.375 C3.1 v1(4.17,0.328) ; C6.1 0.475,4.375 -0.4,5.25 -1.06,5.25 -1.609,5.799 -2.763,5.799 ; v1(1.343,-11.453) 1.347,-11.456 2.084,-11.456 D2.2 ; C4.1 5.865,3.015 5.906,2.975 v1(5.933,2.975) ; U1.2 5.131,-5.456 5.131,-6.331 v1(5.15,-6.35) 5.169,-6.369 5.169,-6.942 C2.1@5.194,-6.967
  Bottom Layer w0.5: v1(-4.4,-1.625) -3.13,-0.355 v1(1.126,-0.355) ; v1(-0.878,-11.956) -0.859,-11.975 -0.349,-11.975 0,-12.325 ; J1.2@0,-13.35 0,-12.325 ; SW1.C 1.499,5.701 3.976,5.701 5,6.725 ; MH1.1 5,6.725 ; 0,-12.325 0.293,-12.032 0.865,-11.46 1.337,-11.46 v1(1.343,-11.453) 2.5,-10.296 SW1.1 4.2,-7.3 v1(5.15,-6.35) 5.15,-4.175 4.17,-3.195 v1(4.17,0.328) 4.17,1.212 v1(5.933,2.975) 5.933,5.792 5,6.725
  other v1: 0,-16.225
JD_DATA: D3.1 FB1.1 J1.3 MH3.1 | length 19.5
  Top Layer w0.2: FB1.1@-5.494,-6.344 -5.362,-6.475 FB1.1@-5.362,-6.579
  Top Layer w0.25: FB1.1 -5.425,-6.375 -5.292,-6.508 -5,-6.8 MH3.1 -4.715,-10.285 -3.271,-10.285 -2.1,-11.457 D3.1
  Bottom Layer w0.25: MH3.1 -4.715,-10.285 -3.271,-10.285 -2.073,-11.484 -2.073,-14.147 J1.3@-1.27,-14.95 ; J1.3@-1.27,-15.588 J1.3@-1.27,-14.95 ; J1.3@1.27,-13.35 1.048,-13.572 0.47,-14.15 -0.47,-14.15 J1.3@-1.27,-14.95
JD_DATA_MCU: D1.3 R1.1 U2.8 | length 10.6
  Top Layer w0.25: D1.3 -6.228,-4.627 -6.053,-4.452 -5.903,-4.452 -5.551,-4.1 R1.1 -4.04,-4.074 -4.04,-3.426 v1(-4.066,-3.4) ; v1(0.47,-2.534) 1.309,-2.534 1.625,-2.851 U2.8@1.625,-3.787
  Bottom Layer w0.25: v1(-4.066,-3.4) -3.999,-3.333 -3.999,-3.042 -3.492,-2.534 v1(0.47,-2.534)
JD_PWR: C2.2 D2.1 J1.1 MH4.1 U1.1 U1.3 | length 20.3
  Top Layer w0.5: J1.1@-1.27,-13.35 -1.27,-13.305 -0.124,-12.159 D2.1 ; D2.1@2.131,-12.159 2.181,-12.209 2.181,-12.831 v1(2.2,-12.85) ; D2.1@2.187,-12.16 2.828,-12.16 3.481,-11.507 3.493,-11.507 MH4.1 4.555,-9.555 4.555,-7.381 4.18,-7.006 C2.2 4.18,-5.455 U1.1 4.125,-5.4 4.125,-4.745 4.418,-4.452 5.759,-4.452 6.052,-4.745 6.052,-5.423 U1.3
  Bottom Layer w0.5: J1.1@1.27,-15.975 1.27,-14.95 2.2,-14.02 v1(2.2,-12.85)
JD_RGB_B: R4.2 U2.14 | length 12.5
  Top Layer w0.15: U2.14 0.995,1.705 0.995,0.782 v1(1.015,0.762) ; R4.2 R4.2@1.697,-9.428
  Top Layer w0.25: R4.2@1.697,-9.428 v1(1.697,-8.86)
  Bottom Layer w0.25: v1(1.015,0.762) 1.015,0.721 2.431,-0.694 2.431,-4.817 1.206,-6.042 1.206,-8.368 v1(1.697,-8.86)
JD_RGB_G: R5.2 U2.17 | length 12.7
  Top Layer w0.25: v1(-1.1,-1.375) -1.037,-1.312 -1.037,1.663 U2.17 ; R5.2 0.414,-7.814 0.477,-7.751 0.477,-7.109 v1(0.504,-7.082)
  Bottom Layer w0.25: v1(-1.1,-1.375) -0.733,-1.742 1.398,-1.742 1.784,-2.129 1.784,-4.6 0.484,-5.901 0.484,-7.062 v1(0.504,-7.082)
JD_RGB_R: R6.2 U2.10 | length 6
  Top Layer w0.25: R6.2 -0.8,-7.458 0.16,-6.498 1.119,-5.538 2.257,-5.538 2.913,-4.883 2.913,-4.037 U2.10
NetC1_2: C1.2 FB1.2 R1.2 | length 2.3
  Top Layer w0.25: FB1.2 -4.025,-6.175 -3.525,-5.675 -3.439,-5.675 C1.2@-2.9,-5.675 ; R1.2 -3.989,-5.1 -3.864,-5.225 -3.864,-5.255 -3.445,-5.675
NetD6_2: D6.2 R6.1 | length 1.2
  Top Layer w0.25: D6.2 -0.8,-9.779 R6.1
NetD6_3: D6.3 R5.1 | length 1.1
  Top Layer w0.15: D6.3@0.45,-9.921 D6.3
  Top Layer w0.25: D6.3@0.45,-9.921 R5.1@0.45,-8.9
NetD6_4: D6.4 R4.1 | length 1.4
  Top Layer w0.25: D6.4 0.729,-10.85 0.828,-10.85 1.217,-10.46 1.665,-10.46 R4.1
NetR2_2: R2.2 R9.2 SW1.B | length 6
  Top Layer w0.3: SW1.B -2.267,7.2 -0.992,5.925 0.125,5.925 0.275,5.775 0.3,5.775 0.4,5.675 R2.2 0.4,5.625 0.999,5.026 2.128,5.026 2.304,4.85 2.328,4.85 R9.2@2.427,4.75
NetR3_2: R3.2 R8.2 SW1.A | length 4.2
  Top Layer w0.3: SW1.A 2.866,7.2 4.418,5.649 4.418,5.624 4.418,5.599 4.922,5.095 R8.2@4.922,4.253 ; R8.2@4.918,4.256 R8.2@4.922,4.253 ; R8.2 R8.2@4.922,4.253
nRESET: J2.5 U2.4 | length 8.8
  Top Layer w0.25: v1(-1.875,0.362) -1.875,-1.669 -0.975,-2.569 U2.4@-0.975,-3.591
  Bottom Layer w0.25: J2.5 -1.9,4.775 -1.9,0.387 v1(-1.875,0.362)
ROT_A: C4.2 R8.1 U2.12 | length 4
  Top Layer w0.25: U2.12 2.275,2.775 2.515,3.015 C4.2 ; C4.2 R8.1
ROT_B: C6.2 R9.1 U2.13 | length 3.6
  Top Layer w0.3: C6.2 1.475,4.325 2.028,3.772 2.028,3.75 ; U2.13 1.625,3.574 1.801,3.75 2.028,3.75 ; R9.1 2.028,3.75
ROT_SW: SW1.2 U2.6 | length 4.9
  Top Layer w0.25: SW1.2 -2.181,-6.981 -1.386,-6.981 0.325,-5.27 U2.6
SWCLK: J2.4 U2.20 | length 1.5
  Top Layer w0.25: J2.4 -3.195,2.891 -3,2.696 -3,1.8 U2.20
SWDIO: J2.2 U2.19 | length 4.7
  Top Layer w0.25: J2.2 -4.465,3.236 -3.728,3.973 -2.601,3.973 -2.275,3.647 U2.19
pads on no net: J1. SW1.M1 SW1.M2 U1.4 U2.2 U2.3 U2.7 U2.9 U2.11 U2.18

## Silkscreen, mask and mechanical layers (free items; w line width, h text height)
Top Overlay:
  region: 187 vertices and 1 holes, not listed, extent 2.644,7.306 5.724,9.406
Bottom Overlay:
  drawing of 6 lines, arcs and shapes, not listed
  text "Rotary Control" at 5.147,-5.028 h1
  text "'.ProjectCodenameID'-'.ProjectRevision'" at 3.219,-6.129 h1
Dimension:
  the board outline again, w0.05
Board Outline:
  the board outline again, w0.1
Top Assy:
  the board outline again, w0.05
Bottom Assy:
  the board outline again, w0.05

## Text inside footprints (layer, text, board x,y; h text height)
J1: Alignment "board outline  / for 'innie'" at -4.53,-10.819 h1.2 r180; Alignment "board outline  / for 'outie'" at -5.14,-13.664 h1.2 r180; Mechanical 9 "Jacdac / cable connector  / body" at 4.821,-22.808 h1.7 r180
MH1: Alignment "5mm dia keepout  / for traces and  / components to  / allow space for  / bushes/standoffs/ / nuts/screw heads" at 7.794,10.839 h0.5; Alignment "board outline can  / be on 2.0mm dia  / radius if necessary" at 7.794,6.394 h0.5
MH2: Alignment "board outline can  / be on 2.0mm dia  / radius if necessary" at -1.444,12.794 h0.5 r90; Alignment "5mm dia keepout  / for traces and  / components to  / allow space for  / bushes/standoffs/ / nuts/screw heads" at -5.889,12.794 h0.5 r90
MH3: Alignment "board outline can  / be on 2.0mm dia  / radius if necessary" at -8.875,-7.8 h0.5 r180; Alignment "5mm dia keepout  / for traces and  / components to  / allow space for  / bushes/standoffs/ / nuts/screw heads" at -9.325,-10.65 h0.5 r180
MH4: Alignment "board outline can  / be on 2.0mm dia  / radius if necessary" at 8.125,-10.819 h0.5; Alignment "5mm dia keepout  / for traces and  / components to  / allow space for  / bushes/standoffs/ / nuts/screw heads" at 2.206,-9.111 h0.5